# Altium PCB MainPCBV6.PcbDoc (part 4 of 5)
Units mm, origin at the board's own origin, x right, y up, seen from the top; angles counter-clockwise.
Board outline 176 x 144.01 mm, 2 copper layers (Top Layer, Bottom Layer); 220 components, 240 nets, 911 pads, 254 vias.
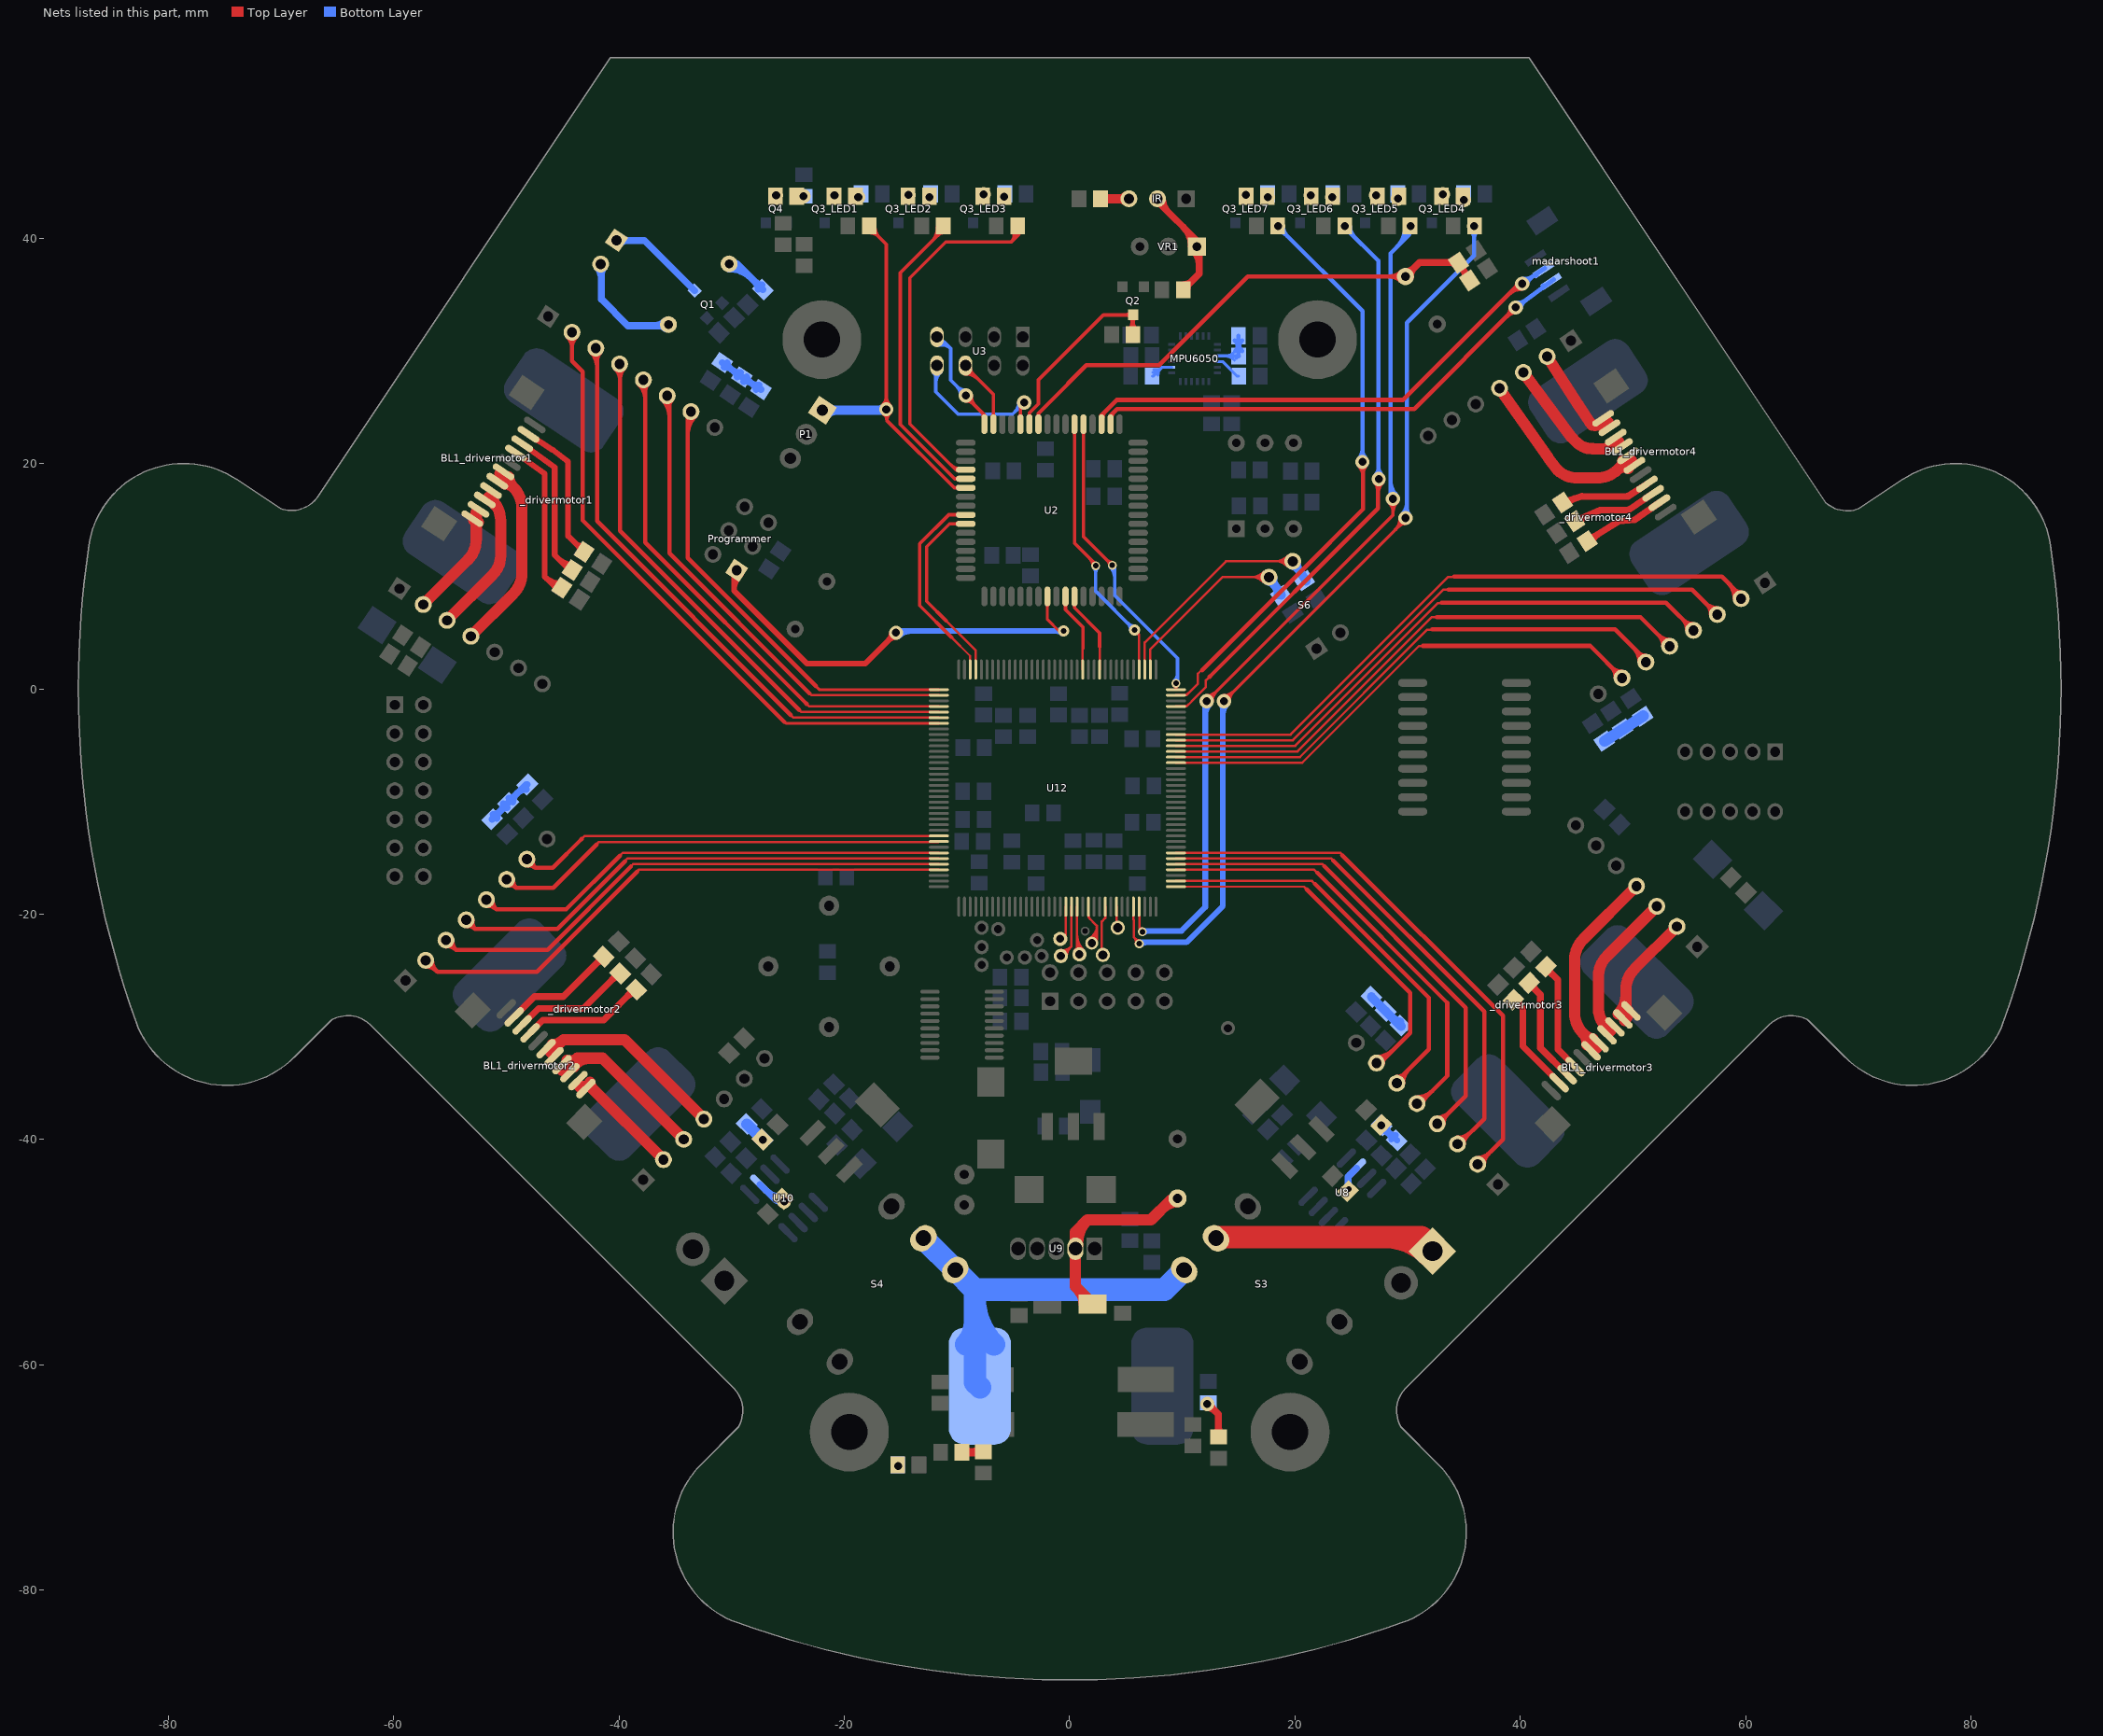
[diagram p4: the nets of this part, all layers, seen from the top]

## Via types
v1: diameter 1.27, hole 0.711, Top Layer to Bottom Layer, 214 vias
v2: diameter 1, hole 0.5, Top Layer to Bottom Layer, 17 vias
v3: diameter 2, hole 1, Top Layer to Bottom Layer, 11 vias
v4: diameter 0.8, hole 0.5, Top Layer to Bottom Layer, 8 vias
v5: diameter 1.778, hole 0.965, Top Layer to Bottom Layer, 3 vias
v6: diameter 0.75, hole 0.5, Top Layer to Bottom Layer, 1 vias

## Nets (pads, with @x,y where several pads share a name; then routed paths per layer and width w, separated by ;. In a path a pad name is that pad's centre, name@x,y a point inside that pad or via, vN(x,y) a via of type N, cw(c..) or ccw(c..) an arc to the next point about the centre after c; other vN are vias at no path point) (continued)
IO131: pad.6 U12.132 | length 8.5
  Top Layer w0.203: U12.132@1.658,-19.339 1.658,-20.276 2.413,-21.031 ; U12.132@1.681,-20.103 ccw(c2.156,-20.103) 1.82,-20.438 ; pad.6@1.734,-22.167 ccw(c1.125,-21.031) 2.413,-21.031 ; pad.6@1.83,-22.346 ccw(c1.307,-21.371) 2.413,-21.371 ; pad.6@1.926,-22.525 ccw(c1.489,-21.71) 2.413,-21.71 ; pad.6@2.022,-22.704 ccw(c1.671,-22.05) 2.413,-22.05 ; pad.6@2.032,-22.657 2.413,-22.276 2.413,-21.031
IO132: pad.16 U12.135 | length 4.2
  Top Layer w0.203: pad.16@2.819,-23.368 2.845,-23.343 2.845,-20.661 3.158,-20.348 U12.135@3.158,-19.339
IO135: pad.15 U12.137 | length 1.9
  Top Layer w0.203: U12.137@4.158,-19.339 4.158,-21.1 pad.15@4.267,-21.209
IO137: pad.13 U12.128 | length 2.9
  Top Layer w0.203: pad.13@-0.66,-22.149 -0.342,-21.831 U12.128@-0.342,-19.339
IO140: pad.4 U12.129 | length 7.2
  Top Layer w0.203: pad.4@-0.787,-23.52 -0.483,-23.52 0.158,-22.88 ; pad.4@-0.752,-23.395 ccw(c-0.672,-22.651) -0.143,-23.18 ; pad.4@-0.73,-23.193 ccw(c-0.614,-22.109) 0.158,-22.88 ; pad.4@-0.254,-23.724 cw(c0.788,-23.724) 0.051,-22.986 ; U12.129@0.158,-19.339 0.158,-22.88
IO141: pad.5 U12.130 | length 7.9
  Top Layer w0.203: pad.5@0.486,-23.194 ccw(c0.073,-22.78) 0.658,-22.78 ; pad.5@0.658,-23.266 U12.130@0.658,-19.339 ; 0.658,-22.768 ccw(c1.667,-22.768) pad.5@0.953,-23.481 ; 0.658,-22.277 ccw(c2.158,-22.277) pad.5@1.097,-23.338 ; 0.658,-21.787 ccw(c2.648,-21.787) pad.5@1.241,-23.194
IR1: Q2.1 R14.2 U2.27 | length 22.6
  Top Layer w0.305: U2.27@-3.661,24.186 ccw(c-3.871,24.396) -3.575,24.396 ccw(c-3.279,24.396) U2.27@-3.488,24.186 ; U2.27@-3.575,23.5 -3.575,24.493 -2.769,25.299 -2.769,27.432 2.992,33.192 Q2.1@5.639,33.192 5.522,33.076 R14.2@5.522,31.445 ; -2.775,25.394 -2.769,25.4 ; R14.2@5.272,31.897 ccw(c4.668,32.501) 5.522,32.501 ; Q2.1@5.428,32.957 cw(c5.202,32.731) Q2.1@5.522,32.731 ; Q2.1@5.428,32.982 ccw(c4.92,32.474) 4.92,33.192 ccw(c4.92,33.911) Q2.1@5.428,33.403 ; R14.2@5.522,32.167 cw(c6.639,32.167) Q2.1@5.849,32.957 ; 5.522,32.256 ccw(c6.334,32.256) R14.2@5.76,31.682 ; Q2.1@5.522,32.992 ccw(c7.07,32.992) R14.2@5.975,31.897 ; 5.658,32.483 cw(c6.062,32.591) Q2.1@5.815,32.927
IRQ: U2.28 U3.8 | length 17.7
  Top Layer w0.305: U2.28@-4.461,24.186 ccw(c-4.671,24.396) -4.375,24.396 ccw(c-4.079,24.396) U2.28@-4.288,24.186 ; U2.28@-4.375,23.5 -4.375,25.14 v1@-4.013,25.502
  Bottom Layer w0.305: U3.8@-12.102,28.086 cw(c-12.621,27.567) -11.887,27.567 ; -11.887,27.076 cw(c-10.46,27.076) U3.8@-11.469,28.086 ; U3.8@-11.786,28.753 -11.887,28.651 -11.887,26.365 -9.906,24.384 -5.08,24.384 v1(-4.039,25.425) ; v1@-4.521,25.425 cw(c-5.686,25.425) -4.862,24.602 cw(c-4.039,23.778) v1@-4.039,24.943
K_TEST: C3.1 R8.1 S2.1 U2.26 | length 54.1
  Top Layer w0.305: U2.26@-2.861,24.186 ccw(c-3.071,24.396) -2.775,24.396 ccw(c-2.479,24.396) U2.26@-2.688,24.186 ; U2.26@-2.775,23.5 -2.775,24.454 -0.127,27.102
  Top Layer w0.4: -0.14,27.114 1.473,28.727 7.925,28.727 15.804,36.607 S2.1@29.808,36.607 ; S2.1@29.41,36.209 ccw(c28.451,35.25) 28.451,36.607 ccw(c28.451,37.963) S2.1@29.41,37.004
  Top Layer w0.6: S2.1@29.808,36.607 31.047,37.846 R8.1@34.569,37.846 ; S2.1@29.808,37.069 ccw(c29.808,38.184) 30.596,37.395 ccw(c31.385,36.607) S2.1@30.27,36.607 ; 33.46,37.846 ccw(c33.46,38.91) R8.1@34.213,38.158 ; R8.1@33.77,37.846 cw(c33.77,37.22) R8.1@34.213,37.663 ; R8.1@34.5,37.401 cw(c34.328,36.577) 35.033,37.038 ; R8.1@34.516,37.827 34.523,37.816 35.535,36.271 C3.1@35.585,36.195 ; R8.1@34.914,37.673 ccw(c35.744,37.5) 35.035,37.035 ; 34.97,37.134 cw(c34.162,36.604) C3.1@35.108,36.407 ; 35.064,36.99 ccw(c35.669,37.386) C3.1@35.522,36.678
KICK_CHIP: madarshoot1.2 U2.18 | length 48.9
  Top Layer w0.4: U2.18@3.625,23.5 3.625,24.254 4.212,24.841 30.582,24.841 v1(39.599,33.858) ; U2.18@3.7,24.1 cw(c4.254,24.1) 3.863,24.492 ; v1@39.164,33.858 cw(c38.113,33.858) 38.856,33.116 cw(c39.599,32.373) v1@39.599,33.423
  Bottom Layer w0.4: v1(39.599,33.858) 42.735,36.169 madarshoot1.2@42.977,36.347 ; v1@39.664,34.288 ccw(c39.821,35.327) 40.444,34.481 ccw(c41.067,33.636) v1@40.029,33.793 ; madarshoot1.2@41.93,35.576 ccw(c41.738,35.837) madarshoot1.2@42.058,35.789
KICK_DIR: madarshoot1.3 U2.19 | length 49.3
  Top Layer w0.4: U2.19@2.825,23.5 2.825,24.303 4.164,25.641 29.578,25.641 v1@39.967,36.03 ; U2.19@2.9,24.1 cw(c3.572,24.1) 3.097,24.574 ; 38.981,35.044 cw(c40.157,33.868) v1@40.157,35.531 ; 39.594,35.657 ccw(c39.285,35.966) v1@39.722,35.966
  Bottom Layer w0.4: v1(40.157,35.966) 42.028,37.229 madarshoot1.3@42.189,37.338 ; v1@40.24,36.393 ccw(c40.44,37.424) 41.028,36.554 ccw(c41.615,35.684) v1@40.584,35.884 ; 41.19,36.664 cw(c41.38,36.382) madarshoot1.3@41.445,36.715
LED1: P1.1 R16_LED1.1 U2.38 | length 41
  Top Layer w0.305: R16_LED1.1@-17.79,40.494 cw(c-17.79,39.318) -16.959,40.149 ; R16_LED1.1@-17.79,40.98 -16.281,39.472 v1(-16.281,24.816) ; R16_LED1.1@-17.293,40.991 ccw(c-16.065,40.991) -16.933,40.123 ; v1@-16.623,25.157 ccw(c-17.447,25.981) -16.281,25.981 ccw(c-15.116,25.981) v1@-15.94,25.157 ; v1@-16.547,24.413 cw(c-16.937,23.824) -16.231,23.824 cw(c-15.358,23.824) v1@-15.953,24.463 ; v1@-16.231,24.714 -16.231,23.825 -10.255,17.85 U2.38@-9.225,17.85 ; U2.38@-9.911,17.763 ccw(c-10.121,17.554) -10.121,17.85 ccw(c-10.121,18.146) U2.38@-9.911,17.936
  Bottom Layer w0.8: P1.1@-21.946,24.74 -16.434,24.74 v1@-16.332,24.841 ; P1.1@-21.55,24.358 cw(c-20.63,23.438) -20.63,24.74 ; P1.1@-21.55,25.065 ccw(c-20.764,25.852) -20.764,24.74 ; -17.033,24.74 ccw(c-17.033,25.567) v1@-16.448,24.982
LED2: R16_LED2.1 U2.37 | length 29.9
  Top Layer w0.305: -12.257,39.712 ccw(c-13.536,40.991) R16_LED2.1@-11.727,40.991 ; -11.737,40.232 ccw(c-12.496,40.991) R16_LED2.1@-11.422,40.991 ; -11.648,40.32 cw(c-11.229,39.901) R16_LED2.1@-11.229,40.494 ; R16_LED2.1@-11.43,40.919 -11.43,40.538 -15.037,36.932 -15.037,23.47 -10.217,18.65 U2.37@-9.225,18.65 ; U2.37@-9.911,18.563 ccw(c-10.121,18.354) -10.121,18.65 ccw(c-10.121,18.946) U2.37@-9.911,18.736
LED3: R16_LED3.1 U2.36 | length 37.1
  Top Layer w0.305: -10.551,19.873 ccw(c-9.825,20.6) U2.36@-9.825,19.572 ; U2.36@-9.911,19.363 ccw(c-10.121,19.154) -10.121,19.45 ccw(c-10.121,19.746) U2.36@-9.911,19.536 ; U2.36@-9.225,19.45 -10.128,19.45 -14.199,23.52 -14.199,36.474 -10.998,39.675 -5.182,39.675 ; R16_LED3.1@-5.052,40.735 cw(c-5.795,40.288) -5.182,39.675 ; -4.906,39.951 ccw(c-5.45,40.495) R16_LED3.1@-4.79,40.892 ; R16_LED3.1@-4.856,40.55 cw(c-5.034,40.208) -4.648,40.208 ; R16_LED3.1@-4.648,41.046 -4.648,40.208 ; R16_LED3.1@-4.633,41.061 ccw(c-4.72,41.148) -4.625,41.07 ccw(c-4.72,41.148) -4.597,41.148 cw(c-4.53,41.215) -4.625,41.215 R16_LED3.1@-4.625,41.421 ; -4.63,40.226 ccw(c-5.106,40.702) R16_LED3.1@-4.529,41.049 ; R16_LED3.1@-4.433,40.532 ccw(c-4.296,40.208) -4.648,40.208 ; -5.182,39.675 -4.648,40.208
LED4: R16_LED4.1 U12.140 | length 92
  Top Layer w0.203: U12.140@5.658,-19.339 5.658,-20.499 5.715,-20.556 5.715,-22.073 ; 5.836,-22.194 ccw(c6.172,-21.858) v4@6.172,-22.333 ; v4@5.878,-22.582 ccw(c5.302,-22.485) 5.715,-22.073 ; v4@6.198,-22.555 5.715,-22.073
  Top Layer w0.305: v1(13.691,-1.092) 29.845,15.062 v1@29.845,15.265 ; v1@13.691,-0.61 ccw(c13.691,0.556) 14.514,-0.268 ccw(c15.338,-1.092) v1@14.173,-1.092 ; 28.906,14.123 ccw(c27.865,15.164) v1@29.337,15.164 ; 29.213,14.43 cw(c29.82,13.823) v1@29.82,14.681 ; 29.426,14.643 ccw(c28.906,15.164) v1@29.642,15.164
  Bottom Layer w0.381: v1@29.505,15.478 ccw(c28.44,16.544) 29.947,16.544 ; v1@29.845,15.24 29.947,15.342 29.947,32.512 35.916,38.481 35.916,41.072 v1@35.814,41.173 ; 29.947,15.93 ccw(c30.586,15.93) v1@30.134,15.478 ; v1@35.576,40.757 cw(c34.756,39.937) 35.916,39.937 ; 35.916,40.06 cw(c36.902,40.06) v1@36.205,40.757
  Bottom Layer w0.508: v4@6.275,-22.735 cw(c6.831,-23.29) 6.831,-22.504 ; v4@6.325,-22.504 10.363,-22.504 13.602,-19.266 v1@13.602,-1.435 ; v1@13.421,-1.362 cw(c12.985,-1.797) 13.602,-1.797 ; 13.602,-2.227 cw(c14.825,-2.227) v1@13.96,-1.362
  other v1: 29.82,15.164 35.89,41.072
  other v4: 6.172,-22.631
LED5: R16_LED5.1 U12.141 | length 89.3
  Top Layer w0.203: U12.141@6.141,-20.119 cw(c6.005,-20.255) 6.198,-20.255 ; U12.141@6.158,-19.339 6.198,-19.379 6.198,-21.209 ; v4@6.211,-21.388 ccw(c6.1,-21.306) 6.198,-21.209 ; v4@6.397,-21.271 cw(c6.357,-21.05) 6.198,-21.209 ; v4@6.502,-21.514 6.198,-21.209
  Top Layer w0.305: v1(12.167,-1.092) 28.702,15.443 v1@28.702,16.713 ; v1@12.167,-0.61 ccw(c12.167,0.556) 12.99,-0.268 ccw(c13.814,-1.092) v1@12.649,-1.092 ; v1@28.361,16.524 cw(c27.537,15.7) 28.702,15.7 cw(c29.867,15.7) v1@29.043,16.524
  Bottom Layer w0.381: v1@28.473,16.713 v1@28.588,16.828 ; 28.473,17.571 ccw(c29.407,17.571) v1@28.747,16.911 ; 28.473,18.491 ccw(c30.327,18.491) v1@29.016,17.18 ; v1@28.6,16.815 28.473,16.942 28.473,38.659 30.15,40.335 v1@30.15,41.123 ; v1@28.629,16.793 v1(28.702,16.866) ; 29.044,39.229 ccw(c27.201,41.072) v1@29.807,41.072 ; 29.694,39.879 ccw(c28.502,41.072) v1@30.188,41.072 ; v1@29.963,40.734 cw(c29.617,40.328) 30.15,40.328 cw(c30.485,40.328) v1@30.384,40.648
  Bottom Layer w0.508: v4@6.426,-21.488 9.931,-21.488 12.04,-19.38 12.04,-1.245 v1@12.167,-1.118 ; v4@6.555,-21.668 cw(c6.988,-22.101) 6.988,-21.488 ; 12.04,-2.319 cw(c13.393,-2.319) v1@12.436,-1.362
  other v1: 30.251,41.072
  other v4: 6.452,-21.565
LED6: R16_LED6.1 U12.33 | length 57.3
  Top Layer w0.203: U12.33@9.433,-1.564 10.374,-1.564 11.23,-0.708 11.23,-0.704 12.09,0.156 12.09,0.762 12.421,1.092 ; U12.33@10.197,-1.54 ccw(c10.197,-1.056) 10.54,-1.398
  Top Layer w0.381: 12.433,1.079 27.356,16.002 v1@27.356,18.618 ; v1@27.118,18.304 cw(c26.543,17.729) 27.356,17.729 ; 27.356,17.361 cw(c28.689,17.361) v1@27.746,18.304
  Bottom Layer w0.381: v1@24.397,40.805 24.6,40.805 27.407,37.998 v1@27.407,18.44 ; v1@24.435,40.627 cw(c24.435,39.799) 25.02,40.385 ; v1@24.879,41.072 ccw(c26.198,41.072) 25.265,40.14 ; v1@27.118,18.933 ccw(c26.42,19.63) 27.407,19.63 ; 27.407,19.753 ccw(c28.566,19.753) v1@27.746,18.933
  other v1: 27.432,18.618 24.435,41.072
LED7: R16_LED7.1 U12.35 | length 57.6
  Top Layer w0.203: U12.35@9.433,-0.564 10.358,-0.564 11.379,0.457 11.379,1.346 11.709,1.676 ; U12.35@10.197,-0.54 ccw(c10.197,-0.094) 10.512,-0.41
  Top Layer w0.381: 11.735,1.651 20.27,10.186 20.271,10.186 26.035,15.95 v1@26.035,20.193 ; v1@25.67,19.828 cw(c24.788,18.946) 26.035,18.946 ; 26.035,19.192 cw(c26.935,19.192) v1@26.299,19.828
  Bottom Layer w0.381: v1@18.491,40.627 cw(c18.491,39.677) 19.163,40.349 ; v1@18.847,40.869 18.644,40.869 25.984,33.528 v1@25.984,20.091 ; v1@18.936,41.072 ccw(c20.131,41.072) 19.286,40.226 ; v1@25.67,20.457 ccw(c24.911,21.215) 25.984,21.215 ccw(c27.057,21.215) v1@26.299,20.457
  other v1: 25.984,20.142 18.491,41.072
M0: R28.1 S6.4 U12.38 | length 22.8
  Top Layer w0.203: U12.38@7.158,1.88 7.158,3.526 13.55,9.917 S6.4@17.685,9.917 ; S6.4@17.227,9.459 ccw(c16.12,8.352) 16.12,9.917 ccw(c16.12,11.483) S6.4@17.227,10.376 ; S6.4@17.371,9.603 ccw(c16.611,8.843) 16.611,9.917 ccw(c16.611,10.992) S6.4@17.371,10.232
  Bottom Layer w0.8: S6.4@17.625,9.573 cw(c17.478,8.741) 18.17,9.225 cw(c18.862,9.71) S6.4@18.03,9.857 ; S6.4@17.685,9.917 18.792,8.337 R28.1@18.796,8.331 ; 18.378,8.929 cw(c17.746,8.486) R28.1@18.505,8.352
M1N1: _drivermotor1.3 U12.74 | length 45.9
  Top Layer w0.203: -23.114,-0.381 -22.931,-0.564 U12.74@-11.617,-0.564
  Top Layer w0.381: _drivermotor1.3@-36.125,25.617 cw(c-37.549,24.192) -35.535,24.192 ; _drivermotor1.3@-35.855,25.886 cw(c-36.629,25.112) -35.535,25.112 ; -35.535,25.131 cw(c-34.848,25.131) _drivermotor1.3@-35.333,25.617 ; _drivermotor1.3@-35.535,25.818 -35.535,12.04 -23.114,-0.381
M1N2: _drivermotor2.3 U12.100 | length 42
  Top Layer w0.203: -42.012,-13.792 -41.834,-13.614 -11.668,-13.614 U12.100@-11.617,-13.564 ; -12.56,-13.614 ccw(c-12.56,-13.385) U12.100@-12.398,-13.547
  Top Layer w0.381: _drivermotor2.3@-49.886,-16.916 -49.149,-17.653 ; _drivermotor2.3@-49.844,-17.461 cw(c-49.665,-18.169) -49.149,-17.653 ; _drivermotor2.3@-49.423,-16.945 ccw(c-48.486,-16.99) -49.149,-17.653 ; -41.999,-13.805 -45.847,-17.653 -49.149,-17.653
M1N3: _drivermotor3.3 U12.2 | length 37.6
  Top Layer w0.203: U12.2@9.433,-17.064 21.509,-17.064 21.793,-17.348 21.844,-17.348
  Top Layer w0.381: 21.793,-17.348 31.872,-27.427 31.872,-32.009 _drivermotor3.3@28.931,-34.95 ; _drivermotor3.3@29.035,-34.461 ccw(c29.035,-33.532) 29.692,-34.189 ; _drivermotor3.3@29.594,-35.021 cw(c31.366,-35.021) 30.113,-33.768
M1N4: _drivermotor4.3 U12.24 | length 49.8
  Top Layer w0.203: U12.24@9.433,-6.064 20.429,-6.064 31.751,5.258 32.182,5.258
  Top Layer w0.381: 32.182,5.283 48.412,5.283 _drivermotor4.3@51.257,2.438 ; 50.072,3.624 cw(c48.823,2.375) _drivermotor4.3@50.589,2.375 ; 50.488,3.208 ccw(c51.149,3.869) _drivermotor4.3@51.149,2.934
M1P1: _drivermotor1.2 U12.73 | length 42.8
  Top Layer w0.254: -22.517,0.216 -22.237,-0.064 U12.73@-11.617,-0.064
  Top Layer w0.381: -33.909,22.544 cw(c-31.557,22.544) _drivermotor1.2@-33.22,24.208 ; -33.909,23.464 cw(c-32.476,23.464) _drivermotor1.2@-33.489,24.477 ; _drivermotor1.2@-33.909,24.31 -33.909,11.608 -22.517,0.216
M1P2: _drivermotor2.2 U12.99 | length 39.5
  Top Layer w0.203: -43.332,-13.335 -43.061,-13.064 U12.99@-11.617,-13.064
  Top Layer w0.381: _drivermotor2.2@-48.184,-15.164 -47.447,-15.9 ; _drivermotor2.2@-48.11,-15.677 cw(c-48.003,-16.457) -47.447,-15.9 ; _drivermotor2.2@-47.639,-15.243 ccw(c-46.944,-15.397) -47.447,-15.9 ; -43.332,-13.335 -45.898,-15.9 -47.447,-15.9
M1P3: _drivermotor3.2 U12.1 | length 35.4
  Top Layer w0.203: U12.1@9.433,-17.564 20.79,-17.564 21.031,-17.805 21.031,-17.831
  Top Layer w0.381: 21.031,-17.805 30.226,-27 30.226,-30.556 27.61,-33.172 _drivermotor3.2@27.254,-33.172 ; _drivermotor3.2@27.239,-33.046 ccw(c27.239,-31.846) 28.088,-32.695 ; _drivermotor3.2@27.239,-32.665 ccw(c27.239,-30.545) 28.738,-32.044 ; _drivermotor3.2@27.798,-33.225 cw(c28.379,-33.225) 27.968,-32.814
M1P4: _drivermotor4.2 U12.23 | length 47.2
  Top Layer w0.203: U12.23@9.433,-6.564 20.636,-6.564 31.01,3.81 31.344,3.81
  Top Layer w0.381: 31.344,3.81 46.203,3.81 _drivermotor4.2@49.073,0.94 ; 48.072,1.941 cw(c47.097,0.966) _drivermotor4.2@48.476,0.966 ; 48.1,1.913 ccw(c49.035,2.848) _drivermotor4.2@49.035,1.525
M2: R30.1 S6.3 U12.39 | length 26.1
  Top Layer w0.203: U12.39@6.658,1.711 6.658,4.118 13.866,11.326 S6.3@19.799,11.326 ; S6.3@19.34,10.868 ccw(c18.233,9.761) 18.233,11.326 ccw(c18.233,12.892) S6.3@19.34,11.785 ; S6.3@19.484,11.012 ccw(c18.724,10.252) 18.724,11.326 ccw(c18.724,12.401) S6.3@19.484,11.641
  Bottom Layer w0.8: S6.3@19.732,10.983 cw(c19.571,10.153) 20.271,10.626 cw(c20.972,11.099) S6.3@20.142,11.26 ; S6.3@19.799,11.326 20.922,9.663 R30.1@20.98,9.576
M2N1: _drivermotor1.5 U12.77 | length 51.9
  Top Layer w0.203: -24.003,-1.88 -23.819,-2.064 U12.77@-11.617,-2.064
  Top Layer w0.381: _drivermotor1.5@-40.351,28.434 cw(c-41.433,27.353) -39.903,27.353 ; _drivermotor1.5@-39.956,28.83 -39.903,28.778 -39.903,14.021 -24.003,-1.88 ; -39.903,27.606 cw(c-38.732,27.606) _drivermotor1.5@-39.56,28.434
M2N2: _drivermotor2.5 U12.103 | length 46.5
  Top Layer w0.203: -39.472,-15.265 -39.27,-15.064 U12.103@-11.617,-15.064
  Top Layer w0.381: _drivermotor2.5@-53.594,-20.498 -52.781,-21.311 ; _drivermotor2.5@-53.501,-21.066 cw(c-53.39,-21.919) -52.781,-21.311 ; _drivermotor2.5@-53.02,-20.592 ccw(c-52.184,-20.713) -52.781,-21.311 ; -39.446,-15.291 -45.466,-21.311 -52.781,-21.311
M2N3: _drivermotor3.5 U12.5 | length 44.7
  Top Layer w0.203: U12.5@9.433,-15.564 22.447,-15.564 22.631,-15.748
  Top Layer w0.381: 22.619,-15.761 35.164,-28.306 35.164,-36.134 _drivermotor3.5@32.512,-38.786 ; _drivermotor3.5@32.627,-38.053 ccw(c32.627,-36.562) 33.681,-37.617 ; _drivermotor3.5@33.186,-38.613 cw(c34.397,-38.613) 33.541,-37.757
M2N4: _drivermotor4.5 U12.26 | length 54.5
  Top Layer w0.203: U12.26@9.433,-5.064 20.015,-5.064 32.699,7.62 33.02,7.62
  Top Layer w0.381: 33.02,7.645 52.934,7.645 _drivermotor4.5@55.524,5.055 ; 54.413,6.166 cw(c53.439,5.192) _drivermotor4.5@54.816,5.192 ; 54.439,6.14 ccw(c55.376,7.076) _drivermotor4.5@55.376,5.752
M2P1: _drivermotor1.4 U12.76 | length 49.5
  Top Layer w0.203: -23.368,-1.321 -23.125,-1.564 U12.76@-11.617,-1.564
  Top Layer w0.381: _drivermotor1.4@-38.238,27.026 cw(c-39.614,25.65) -37.668,25.65 ; _drivermotor1.4@-37.969,27.295 cw(c-38.694,26.57) -37.668,26.57 ; _drivermotor1.4@-37.842,27.421 -37.668,27.247 -37.668,12.979 -23.368,-1.321 ; -37.668,26.491 cw(c-36.912,26.491) _drivermotor1.4@-37.447,27.026
M2P2: _drivermotor2.4 U12.102 | length 44.4
  Top Layer w0.203: -39.929,-14.808 -39.684,-14.564 U12.102@-11.617,-14.564
  Top Layer w0.381: _drivermotor2.4@-51.765,-18.72 -50.902,-19.583 ; _drivermotor2.4@-51.736,-19.273 cw(c-51.658,-20.34) -50.902,-19.583 ; _drivermotor2.4@-51.219,-18.748 ccw(c-50.131,-18.813) -50.902,-19.583 ; -39.929,-14.808 -44.704,-19.583 -50.902,-19.583
M2P3: _drivermotor3.4 U12.4 | length 42.1
  Top Layer w0.203: U12.4@9.433,-16.064 21.703,-16.064 21.996,-16.358
  Top Layer w0.381: 21.996,-16.358 33.518,-27.879 33.518,-34.376 _drivermotor3.4@30.937,-36.957 ; _drivermotor3.4@30.831,-36.638 ccw(c30.831,-35.612) 31.556,-36.338 ; _drivermotor3.4@30.831,-36.257 ccw(c30.831,-34.311) 32.207,-35.687 ; _drivermotor3.4@31.39,-36.817 cw(c32.145,-36.817) 31.611,-36.283
M2P4: _drivermotor4.4 U12.25 | length 52.1
  Top Layer w0.203: U12.25@9.433,-5.564 20.222,-5.564 32.161,6.375 32.588,6.375
  Top Layer w0.381: 32.588,6.375 50.673,6.375 _drivermotor4.4@53.365,3.683 ; 52.305,4.743 cw(c51.345,3.784) _drivermotor4.4@52.703,3.784 ; 52.312,4.737 ccw(c53.262,5.687) _drivermotor4.4@53.262,4.343
M3N1: _drivermotor1.7 U12.79 | length 58.3
  Top Layer w0.254: -25.354,-2.916 -25.206,-3.064 U12.79@-11.617,-3.064
  Top Layer w0.381: _drivermotor1.7@-44.578,31.252 cw(c-45.533,30.297) -44.183,30.297 cw(c-42.832,30.297) _drivermotor1.7@-43.787,31.252 ; _drivermotor1.7@-44.183,31.648 -44.183,29.095 -43.231,28.143 -43.231,14.961 -25.354,-2.916
M3N2: _drivermotor2.7 U12.105 | length 51.9
  Top Layer w0.203: -38.405,-16.205 -38.263,-16.064 U12.105@-11.617,-16.064
  Top Layer w0.381: _drivermotor2.7@-57.175,-24.079 -56.134,-25.121 -47.283,-25.121 -38.386,-16.224 ; _drivermotor2.7@-57.166,-24.663 cw(c-57.166,-26.047) -56.186,-25.068 ; _drivermotor2.7@-56.606,-24.103 ccw(c-55.289,-24.103) -56.22,-25.034
M3N3: _drivermotor3.7 U12.7 | length 51.4
  Top Layer w0.203: U12.7@9.433,-14.564 24.038,-14.564 24.206,-14.732
  Top Layer w0.381: 24.181,-14.757 38.456,-29.032 38.456,-40.005 _drivermotor3.7@36.17,-42.291 ; _drivermotor3.7@36.219,-41.646 ccw(c36.219,-40.206) 37.237,-41.224 ; _drivermotor3.7@36.778,-42.205 cw(c38.04,-42.205) 37.148,-41.313
M3N4: _drivermotor4.7 U12.28 | length 59.8
  Top Layer w0.203: U12.28@9.433,-4.064 19.601,-4.064 33.596,9.931 34.112,9.931
  Top Layer w0.381: 34.112,9.957 57.887,9.957 59.487,8.357 _drivermotor4.7@59.842,8.357 ; 58.484,9.359 cw(c57.135,8.01) _drivermotor4.7@59.043,8.01 ; 59.041,8.802 ccw(c59.602,9.364) _drivermotor4.7@59.602,8.57 ; 59.135,8.709 cw(c58.436,8.01) _drivermotor4.7@59.424,8.01
M3P1: _drivermotor1.6 U12.78 | length 55.1
  Top Layer w0.203: -24.751,-2.325 -24.513,-2.564 U12.78@-11.617,-2.564
  Top Layer w0.381: _drivermotor1.6@-42.465,29.843 cw(c-43.682,28.626) -41.961,28.626 ; _drivermotor1.6@-42.069,30.239 -41.961,30.131 -41.961,14.884 -24.751,-2.325 ; -41.961,29.15 cw(c-40.98,29.15) _drivermotor1.6@-41.674,29.843
M3P2: _drivermotor2.6 U12.104 | length 49
  Top Layer w0.203: -38.964,-15.773 -38.754,-15.564 U12.104@-11.617,-15.564
  Top Layer w0.381: _drivermotor2.6@-55.321,-22.327 -54.483,-23.165 ; _drivermotor2.6@-55.317,-22.864 cw(c-55.22,-23.902) -54.483,-23.165 ; _drivermotor2.6@-54.81,-22.329 ccw(c-53.691,-22.372) -54.483,-23.165 ; -38.951,-15.786 -46.33,-23.165 -54.483,-23.165
M3P3: _drivermotor3.6 U12.6 | length 47.7
  Top Layer w0.203: U12.6@9.433,-15.064 23.243,-15.064 23.419,-15.24
  Top Layer w0.381: 23.406,-15.253 36.81,-28.656 36.81,-38.171 _drivermotor3.6@34.671,-40.31 ; _drivermotor3.6@34.423,-39.849 ccw(c34.423,-38.139) 35.632,-39.348 ; _drivermotor3.6@34.982,-40.409 cw(c35.973,-40.409) 35.273,-39.708
M3P4: _drivermotor4.6 U12.27 | length 56.8
  Top Layer w0.203: U12.27@9.433,-4.564 19.808,-4.564 33.186,8.814 33.63,8.814
  Top Layer w0.381: 33.63,8.814 55.245,8.814 _drivermotor4.6@57.582,6.477 ; 56.48,7.579 ccw(c57.489,8.588) _drivermotor4.6@57.489,7.161 ; 56.556,7.503 cw(c55.655,6.601) _drivermotor4.6@56.929,6.601
MISO: U2.32 U3.7 | length 16.3
  Top Layer w0.305: v1@-9.246,25.984 -7.785,24.524 ; v1@-9.22,25.552 cw(c-9.22,24.571) -8.526,25.265 ; v1@-8.738,26.035 ccw(c-7.389,26.035) -8.342,25.081 ; U2.32@-7.689,24.144 ccw(c-8.033,24.276) -7.772,24.536 -7.575,24.339 U2.32@-7.575,23.5 ; U2.32@-7.62,23.368 U2.32@-7.62,23.5
  Bottom Layer w0.305: U3.7@-11.963,31.471 -11.836,31.471 -10.566,30.201 ; U3.7@-11.751,30.803 cw(c-11.545,29.983) -10.947,30.581 ; U3.7@-11.677,30.508 cw(c-11.393,29.374) -10.566,30.201 ; -10.062,26.902 cw(c-10.929,26.035) v1@-9.703,26.035 ; -10.001,26.841 ccw(c-9.22,27.621) v1@-9.22,26.518 ; v1(-9.22,26.035) v1@-9.195,26.035 ; v1@-9.144,25.984 v1@-9.195,26.035 ; v1@-9.144,26.035 v1@-9.195,26.035 ; -10.566,30.201 -10.566,27.407 v1@-9.195,26.035
MISO_CUR1: U2.42 U12.69 | length 17.5
  Top Layer w0.203: -10.947,6.019 -8.342,3.415 U12.69@-8.342,1.711
  Top Layer w0.305: -10.947,6.019 -12.7,7.772 -12.7,12.624 -10.674,14.65 U2.42@-9.225,14.65 ; U2.42@-9.911,14.563 ccw(c-10.121,14.354) -10.121,14.65 ccw(c-10.121,14.946) U2.42@-9.911,14.736
MISO_CUR2: U2.22 U12.40 | length 28.2
  Top Layer w0.203: v2(5.766,5.207) 6.158,4.815 ; v2@5.943,4.85 cw(c6.026,4.683) 6.158,4.815 ; v2@6.123,5.03 ccw(c6.29,4.947) 6.158,4.815 ; U12.40@6.158,1.711 6.158,4.815
  Top Layer w0.305: U2.22@0.339,22.813 cw(c0.129,22.604) 0.425,22.604 cw(c0.721,22.604) U2.22@0.512,22.813 ; U2.22@0.425,23.5 0.425,12.935 2.438,10.922 v4(2.311,10.922) ; 1.799,11.561 cw(c1.159,10.922) v4@2.064,10.922
  Bottom Layer w0.305: v4@2.136,10.747 cw(c1.714,10.324) 2.311,10.324 cw(c2.909,10.324) v4@2.486,10.747 ; v4(2.311,10.922) 2.311,8.661 v2(5.766,5.207) ; v2@5.418,5.207 ccw(c4.579,5.207) 5.172,5.8 ccw(c5.766,6.394) v2@5.766,5.555
MOSI: U2.31 U3.6 | length 9.1
  Top Layer w0.305: U3.6@-9.271,28.651 -6.775,26.155 U2.31@-6.775,23.5 ; U3.6@-9.246,27.954 cw(c-9.246,26.334) -8.099,27.48 ; U3.6@-9.246,28.259 cw(c-9.246,27.374) -8.62,28 ; U3.6@-8.798,28.402 ccw(c-8.258,28.402) -8.64,28.02 ; U2.31@-6.861,24.186 ccw(c-7.071,24.396) -6.775,24.396 ccw(c-6.479,24.396) U2.31@-6.688,24.186
  Top Layer w0.4: U3.6@-9.246,28.702 U3.6@-9.233,28.689
MOSI_CUR1: U2.41 U12.70 | length 18.6
  Top Layer w0.203: -10.486,4.568 -8.842,2.924 U12.70@-8.842,1.711
  Top Layer w0.305: -10.486,4.568 -13.31,7.391 -13.31,12.878 -10.738,15.45 U2.41@-9.225,15.45 ; U2.41@-9.911,15.363 ccw(c-10.121,15.154) -10.121,15.45 ccw(c-10.121,15.746) U2.41@-9.911,15.536
MOSI_CUR2: U2.21 U12.36 | length 31.5
  Top Layer w0.203: v4@9.272,0.232 cw(c9.082,-0.064) U12.36@9.433,-0.064 ; v4(9.433,0.483) U12.36@9.433,-0.064 ; v4@9.594,0.232 ccw(c9.784,-0.064) U12.36@9.433,-0.064
  Top Layer w0.305: U2.21@1.139,22.813 cw(c0.929,22.604) 1.225,22.604 cw(c1.521,22.604) U2.21@1.312,22.813 ; U2.21@1.225,23.5 1.225,13.507 3.759,10.973 v4(3.785,10.973) ; 3.319,11.413 ccw(c3.785,11.879) v4@3.785,11.22 ; 3.38,11.352 cw(c3.001,10.973) v4@3.537,10.973
  Bottom Layer w0.305: v4@3.61,10.798 cw(c2.696,9.884) 3.988,9.884 ; v4(3.785,10.973) 3.988,10.77 3.988,8.306 9.576,2.718 9.576,0.626 v4(9.433,0.483) ; v4@3.825,11.013 cw(c3.432,10.62) 3.988,10.62 ; v4@9.258,0.658 ccw(c8.49,1.426) 9.576,1.426
MOTOR_NUM0: U2.58 U12.50 | length 7.8
  Top Layer w0.203: 1.118,3.734 1.158,3.694 U12.50@1.158,1.711
  Top Layer w0.305: U2.58@-0.461,7.513 cw(c-0.671,7.304) -0.375,7.304 cw(c-0.079,7.304) U2.58@-0.288,7.513 ; U2.58@-0.375,8.2 -0.375,7.03 1.168,5.486 1.168,3.581
MOTOR_NUM1: U2.59 U12.47 | length 7.9
  Top Layer w0.203: U12.47@2.658,1.711 2.658,3.743
  Top Layer w0.305: U2.59@0.339,7.513 cw(c0.129,7.304) 0.425,7.304 cw(c0.721,7.304) U2.59@0.512,7.513 ; U2.59@0.425,8.2 0.425,7.195 2.658,4.962 2.658,3.743 2.667,3.734
MW1_DriverMotor1: _drivermotor1.14 BL1_drivermotor1.1 BL1_drivermotor1.2 | length 11
  Top Layer w1: _drivermotor1.14@-57.391,7.485 -53.424,11.453 ccw(c-55.22,13.249) -52.68,13.249 -52.68,15.646 ; BL1_drivermotor1.1@-52.893,14.964 ccw(c-53.407,15.479) -52.68,15.479 ; -52.68,14.393 cw(c-52.1,14.393) BL1_drivermotor1.1@-52.51,14.803
MW1_DriverMotor2: _drivermotor2.14 BL1_drivermotor2.1 BL1_drivermotor2.2 | length 10.8
  Top Layer w1: -43.485,-35.331 -43.459,-35.306 -42.55,-35.306 _drivermotor2.14@-36.062,-41.794 ; BL1_drivermotor2.1@-42.583,-34.925 ccw(c-41.744,-34.925) -42.338,-35.519
MW1_DriverMotor3: _drivermotor3.14 BL1_drivermotor3.1 BL1_drivermotor3.2 | length 12.7
  Top Layer w1: BL1_drivermotor3.2@48.686,-28.881 ccw(c47.015,-27.21) 49.378,-27.21 ; BL1_drivermotor3.2@49.251,-29.446 ccw(c48.456,-28.651) BL1_drivermotor3.1@49.581,-28.651 ; 49.378,-28.981 49.378,-26.686 cw(c51.918,-26.686) 49.581,-25.69 cw(c51.918,-26.686) 50.122,-24.89 _drivermotor3.14@53.91,-21.101 ; 49.581,-28.956 BL1_drivermotor3.1@49.581,-28.598
MW1_DriverMotor4: _drivermotor4.14 BL1_drivermotor4.1 BL1_drivermotor4.2 | length 9.4
  Top Layer w1: _drivermotor4.14@42.378,29.497 45.141,25.216 46.355,23.393 47.128,23.393 ccw(c47.128,24.347) 47.464,23.454 ccw(c47.128,24.347) 47.803,23.673 ; 46.14,23.716 ccw(c46.814,24.164) BL1_drivermotor4.1@46.655,23.371
MW2_DriverMotor1: _drivermotor1.13 BL1_drivermotor1.3 BL1_drivermotor1.4 | length 13.5
  Top Layer w1: _drivermotor1.13@-55.278,6.076 -51.194,10.16 ccw(c-52.82,11.786) -50.521,11.786 -50.521,14.95 ccw(c-53.061,14.95) -51.265,16.746 -51.562,17.043 ; BL1_drivermotor1.3@-51.169,16.505 cw(c-51.369,16.108) -50.947,16.247
MW2_DriverMotor2: _drivermotor2.13 BL1_drivermotor2.3 BL1_drivermotor2.4 | length 18.8
  Top Layer w1: BL1_drivermotor2.4@-45.148,-33.817 ccw(c-44.95,-33.505) -44.688,-33.766 ; BL1_drivermotor2.4@-44.612,-32.973 ccw(c-44.264,-32.426) -43.806,-32.884 ccw(c-43.305,-33.385) BL1_drivermotor2.3@-43.991,-33.561 ; BL1_drivermotor2.4@-44.567,-32.994 ccw(c-44.305,-32.2) -43.713,-32.791 ; -44.425,-33.503 -43.713,-32.791 ; BL1_drivermotor2.3@-43.997,-33.519 cw(c-43.026,-33.479) -43.713,-32.791 ; BL1_drivermotor2.3@-43.939,-33.37 cw(c-42.543,-34.766) -42.543,-32.791 ; _drivermotor2.13@-34.266,-39.998 -41.473,-32.791 -43.713,-32.791
MW2_DriverMotor3: _drivermotor3.13 BL1_drivermotor3.3 BL1_drivermotor3.4 | length 14.4
  Top Layer w1: 47.854,-30.302 47.683,-30.132 cw(c49.479,-28.336) 47.273,-29.595 ; 48.031,-30.353 47.273,-29.595 ; _drivermotor3.13@52.114,-19.305 47.683,-23.736 ccw(c49.479,-25.532) 46.965,-25.174 ccw(c49.479,-25.532) 46.939,-25.532 46.939,-28.336 ccw(c49.479,-28.336) 46.965,-28.694 ccw(c49.479,-28.336) 47.273,-29.595
MW2_DriverMotor4: _drivermotor4.13 BL1_drivermotor4.3 BL1_drivermotor4.4 | length 12.1
  Top Layer w1: _drivermotor4.13@40.259,28.092 40.263,28.087 40.308,28.027 44.588,22.287 44.97,21.905 ccw(c46.406,23.341) 46.406,21.311 ; 46.228,21.341 ccw(c46.617,23.851) 46.617,21.311 ; 46.558,21.285 47.103,21.285 ccw(c47.103,23.55) 48.501,21.768 ccw(c47.103,23.55) 48.704,21.948
MW3_DriverMotor1: _drivermotor1.12 BL1_drivermotor1.5 BL1_drivermotor1.6 | length 18.7
  Top Layer w1: _drivermotor1.12@-53.165,4.667 -49.385,8.446 ccw(c-51.181,10.242) -48.641,10.242 -48.641,16.093 ccw(c-51.181,16.093) -49.385,17.889 ; -50.597,19.101 -49.385,17.889 ; BL1_drivermotor1.5@-50.158,18.19 cw(c-50.114,17.16) -49.385,17.889 ; BL1_drivermotor1.6@-49.795,18.822 ccw(c-48.531,18.822) -49.425,17.929
MW3_DriverMotor2: _drivermotor2.12 BL1_drivermotor2.5 BL1_drivermotor2.6 | length 19
  Top Layer w1: -46.076,-32.283 -44.933,-31.14 -39.532,-31.14 _drivermotor2.12@-32.47,-38.202 ; BL1_drivermotor2.6@-45.925,-31.59 ccw(c-45.888,-30.371) -45.025,-31.233 ; BL1_drivermotor2.6@-45.919,-31.59 ccw(c-45.919,-30.294) -45.002,-31.21
MW3_DriverMotor3: _drivermotor3.12 BL1_drivermotor3.5 BL1_drivermotor3.6 | length 19
  Top Layer w1: 45.781,-30.795 ccw(c46.423,-30.152) BL1_drivermotor3.5@46.423,-31.061 ; BL1_drivermotor3.6@45.914,-31.595 ccw(c44.73,-31.434) 45.575,-30.589 ; 46.609,-31.725 46.787,-31.902 ; 46.66,-31.674 45.575,-30.589 ; _drivermotor3.12@50.318,-17.509 45.575,-22.252 ccw(c47.371,-24.048) 44.831,-24.048 44.831,-28.793 ccw(c47.371,-28.793) 45.575,-30.589
MW3_DriverMotor4: _drivermotor4.12 BL1_drivermotor4.5 BL1_drivermotor4.6 | length 17.9
  Top Layer w1: _drivermotor4.12@38.075,26.772 38.144,26.673 38.281,26.478 42.455,20.539 43.282,19.457 ccw(c45.07,21.26) 45.07,18.72 46.848,18.72 ccw(c46.848,21.26) 47.494,18.803 ccw(c46.848,21.26) 48.644,19.464 ; 48.897,19.716 ccw(c48.374,20.239) BL1_drivermotor4.5@49.113,20.239 ; BL1_drivermotor4.6@49.571,19.578 ccw(c49.181,18.927) 48.644,19.464 ; 49.886,20.269 ccw(c49.886,19.217) 49.142,19.961 48.644,19.464
NetBattery1_1: Battery1.1 S3.2 | length 25.8
  Top Layer w2: S3.2@12.987,-48.775 13.096,-48.666 31.217,-48.666 ; 27.945,-48.666 cw(c27.945,-54.199) Battery1.1@31.857,-50.287 ; Battery1.1@31.711,-49.917 ccw(c30.022,-49.861) 31.217,-48.666 ; Battery1.1@32.512,-49.962 31.217,-48.666
NetBL1_drivermotor1_8: BL1_drivermotor1.8 R11_drivermotor1.2 | length 16.4
  Top Layer w0.508: BL1_drivermotor1.8@-49.151,20.93 -46.609,19.101 -46.609,9.954 ; -45.788,9.133 ccw(c-45.125,9.796) R11_drivermotor1.2@-45.088,8.859 ; R11_drivermotor1.2@-45.448,8.793 -46.609,9.954 ; R11_drivermotor1.2@-45.108,9.367 cw(c-45.188,11.375) -46.609,9.954
NetBL1_drivermotor1_9: BL1_drivermotor1.9 R10_drivermotor1.2 | length 14.9
  Top Layer w0.508: BL1_drivermotor1.9@-48.596,21.762 -45.72,19.66 -45.72,11.885 R10_drivermotor1.2@-44.255,10.419 ; -45.4,11.565 ccw(c-44.097,12.868) R10_drivermotor1.2@-44.097,11.025
NetBL1_drivermotor1_10: BL1_drivermotor1.10 R9_drivermotor1.2 | length 14.4
  Top Layer w0.508: BL1_drivermotor1.10@-48.042,22.594 -45.889,21.2 -44.526,20.193 -44.526,13.561 R9_drivermotor1.2@-43.111,12.146 ; -43.969,13.004 ccw(c-43.056,13.916) R9_drivermotor1.2@-43.056,12.625 ; -43.634,12.669 cw(c-44.073,12.229) R9_drivermotor1.2@-43.452,12.229
NetBL1_drivermotor2_8: BL1_drivermotor2.8 R11_drivermotor2.2 | length 12.2
  Top Layer w0.6: BL1_drivermotor2.8@-47.899,-30.541 -46.771,-29.413 -41.377,-29.413 R11_drivermotor2.2@-38.608,-26.645 ; -39.21,-27.247 cw(c-38.55,-27.907) R11_drivermotor2.2@-38.55,-26.974 ; -39.122,-27.159 ccw(c-39.657,-26.624) R11_drivermotor2.2@-38.9,-26.624
NetBL1_drivermotor2_9: BL1_drivermotor2.9 R10_drivermotor2.2 | length 11.8
  Top Layer w0.6: BL1_drivermotor2.9@-48.606,-29.834 -47.143,-28.372 -43.18,-28.372 R10_drivermotor2.2@-40.03,-25.222 ; -40.62,-25.812 cw(c-39.971,-26.461) R10_drivermotor2.2@-39.971,-25.543 ; -40.547,-25.739 ccw(c-41.093,-25.193) R10_drivermotor2.2@-40.321,-25.193
NetBL1_drivermotor2_10: BL1_drivermotor2.10 R9_drivermotor2.2 | length 11.6
  Top Layer w0.6: BL1_drivermotor2.10@-49.313,-29.127 -47.516,-27.33 -44.958,-27.33 R9_drivermotor2.2@-41.3,-23.673 ; -42.036,-24.409 cw(c-41.36,-25.085) R9_drivermotor2.2@-41.36,-24.129 ; -41.925,-24.297 ccw(c-42.443,-23.779) R9_drivermotor2.2@-41.71,-23.779
NetBL1_drivermotor3_8: BL1_drivermotor3.8 R11_drivermotor3.2 | length 11.2
  Top Layer w0.6: R11_drivermotor3.2@42.219,-25.091 cw(c42.219,-25.991) 42.855,-25.355 ; R11_drivermotor3.2@42.24,-24.74 43.332,-25.832 43.332,-32.013 BL1_drivermotor3.8@44.867,-33.548 ; R11_drivermotor3.2@42.569,-24.741 ccw(c43.359,-24.741) 42.8,-25.3
NetBL1_drivermotor3_9: BL1_drivermotor3.9 R10_drivermotor3.2 | length 10.7
  Top Layer w0.6: R10_drivermotor3.2@40.786,-26.455 cw(c40.786,-27.176) 41.296,-26.666 ; R10_drivermotor3.2@40.869,-26.238 41.783,-27.153 41.783,-31.878 BL1_drivermotor3.9@44.16,-34.255 ; R10_drivermotor3.2@41.136,-26.105 ccw(c42.105,-26.105) 41.42,-26.79
NetBL1_drivermotor3_10: BL1_drivermotor3.10 R9_drivermotor3.2 | length 10.3
  Top Layer w0.6: R9_drivermotor3.2@39.442,-27.89 cw(c39.442,-28.699) 40.014,-28.127 ; R9_drivermotor3.2@39.497,-27.61 40.234,-28.346 40.234,-31.742 BL1_drivermotor3.10@43.453,-34.962 ; R9_drivermotor3.2@39.792,-27.54 ccw(c40.674,-27.54) 40.05,-28.163
NetBL1_drivermotor4_8: BL1_drivermotor4.8 R11_drivermotor4.2 | length 8.9
  Top Layer w0.6: R11_drivermotor4.2@43.747,16.541 45.385,17.069 45.464,17.095 45.49,17.069 49.454,17.069 49.479,17.094 49.581,17.094 BL1_drivermotor4.8@51.243,18.186 ; R11_drivermotor4.2@44.114,16.298 cw(c45.158,15.763) 44.798,16.88
NetBL1_drivermotor4_9: BL1_drivermotor4.9 R10_drivermotor4.2 | length 8.8
  Top Layer w0.6: R10_drivermotor4.2@44.834,14.878 R10_drivermotor4.2@45.133,15.008 ; R10_drivermotor4.2@44.907,14.783 R10_drivermotor4.2@45.133,15.008 ; R10_drivermotor4.2@45.215,14.667 cw(c46.315,14.236) 45.842,15.318 ; 49.581,15.875 47.117,15.875 R10_drivermotor4.2@45.133,15.008 ; 49.682,15.926 BL1_drivermotor4.9@51.798,17.354
NetBL1_drivermotor4_10: BL1_drivermotor4.10 R9_drivermotor4.2 | length 10.2
  Top Layer w0.6: R9_drivermotor4.2@45.931,13.112 46.611,13.541 ; R9_drivermotor4.2@46.02,13.45 ccw(c46.212,14.174) 46.611,13.541 ; R9_drivermotor4.2@46.275,13.046 cw(c47.011,12.907) 46.611,13.541 ; R9_drivermotor4.2@46.328,12.951 cw(c47.485,12.689) 46.852,13.692 ; R9_drivermotor4.2@46.336,13.016 cw(c47.013,12.993) 46.652,13.566 ; BL1_drivermotor4.10@52.352,16.522 50.165,15.009 48.743,14.884 46.611,13.541
NetC7_2: C7.2 R12.2 R35.1 | length 9.5
  Bottom Layer w0.6: C7.2@-30.842,28.959 R35.1@-29.089,27.689 R12.2@-27.413,26.571 ; C7.2@-30.704,28.558 cw(c-30.573,27.737) -30.085,28.41 ; C7.2@-30.413,28.959 ccw(c-29.566,29.094) -30.069,28.399 ; -29.862,28.249 cw(c-30.366,27.554) R35.1@-29.518,27.689 ; -29.847,28.238 ccw(c-29.359,28.911) R35.1@-29.228,28.09 ; R35.1@-28.938,27.29 cw(c-28.772,26.462) -28.303,27.165 cw(c-27.834,27.868) R35.1@-28.663,27.702 ; R12.2@-27.839,26.558 ccw(c-28.668,26.393) -28.199,27.096 ccw(c-27.731,27.799) R12.2@-27.565,26.97
NetC8_2: C8.2 R36.2 R37.1 | length 4.3
  Bottom Layer w0.8: R36.2@26.783,-27.344 R37.1@28.053,-28.614 29.385,-29.947 C8.2@29.439,-29.947 ; 28.79,-29.351 ccw(c29.303,-28.838) C8.2@29.303,-29.564
NetC9_2: C9.2 R38.2 R39.1 | length 2.2
  Bottom Layer w1: C9.2@-28.663,-38.645 -27.127,-40.18 R38.2@-27.127,-40.183
  other v1: -27.254,-40.056
NetC10_2: C10.2 R40.2 R41.1 | length 9.4
  Bottom Layer w0.6: C10.2@-51.269,-11.571 -49.835,-10.137 -49.835,-10.058 -48.26,-8.484 R40.2@-48.133,-8.484 ; C10.2@-51.198,-11.15 ccw(c-51.198,-10.305) -50.6,-10.903 ccw(c-50.003,-11.5) C10.2@-50.848,-11.5 ; -50.532,-10.835 ccw(c-51.173,-10.194) R41.1@-50.267,-10.194 ; -50.471,-10.773 cw(c-49.917,-11.328) R41.1@-49.917,-10.544 ; R41.1@-49.775,-9.703 ccw(c-49.775,-8.987) -49.269,-9.493 ; R41.1@-49.425,-10.053 cw(c-48.451,-10.053) -49.14,-9.364 ; -49.034,-9.258 cw(c-48.215,-10.076) R40.2@-48.215,-8.918
NetC21_1: C21.1 U8.6 | length 3.8
  Bottom Layer w0.6: 24.714,-43.732 ccw(c25.457,-43.732) v2@24.932,-44.258 ; 24.714,-43.556 cw(c25.326,-43.556) U8.6@24.893,-43.124 ; v2(24.79,-44.399) 24.816,-44.425 24.816,-44.545 24.714,-44.647 24.714,-43.303 U8.6@25.459,-42.558
NetC28_1: C28.1 U10.6 | length 5
  Bottom Layer w0.6: U10.6@-27.505,-43.99 -26.079,-45.415 ; U10.6@-26.994,-44.501 ccw(c-25.349,-42.856) v1@-25.349,-45.182 ; v1@-25.644,-45.675 ccw(c-26.079,-45.909) -26.079,-45.415 ; v1@-25.451,-45.415 -26.079,-45.415
  other v1: -25.349,-45.517
NetC30_2: C30.2 MPU6050.20 | length 4.1
  Bottom Layer w0.254: C30.2@7.317,27.746 7.402,27.746 8.218,28.562 ; C30.2@7.385,28.106 ccw(c7.52,28.63) C30.2@7.903,28.247 ; C30.2@7.448,28.352 ccw(c7.65,29.13) 8.218,28.562 ; C30.2@7.84,27.846 cw(c8.658,27.846) 8.08,28.424 ; MPU6050.20@9.057,28.562 8.218,28.562
NetC31_2: C31.2 MPU6050.10 | length 2.4
  Bottom Layer w0.254: MPU6050.10@13.107,29.062 13.568,29.062 14.88,27.749 C31.2@15.009,27.749
NetC59_2: C59.2 R42.2 R43.1 | length 4.1
  Bottom Layer w1: R42.2@47.466,-4.651 49.11,-3.588 50.874,-2.447 C59.2@50.927,-2.413
NetC60_2: C60.2 R44.1 R45.2 | length 7.7
  Bottom Layer w0.508: R45.2@27.574,-39.131 cw(c27.216,-40.673) R44.1@28.586,-39.882 ; R45.2@27.661,-39.141 cw(c27.661,-40.177) 28.393,-39.445 ; R45.2@27.697,-38.749 29.03,-40.081 R44.1@29.083,-40.081 ; R45.2@27.768,-39.216 cw(c27.768,-40.172) 28.444,-39.496 cw(c29.12,-38.82) R45.2@28.164,-38.82 ; R45.2@28.042,-38.76 ccw(c28.845,-38.76) 28.277,-39.329 ; 28.253,-39.305 cw(c27.534,-40.025) R44.1@28.551,-40.025 ; 28.315,-39.366 ccw(c28.947,-38.734) R44.1@28.947,-39.629
  other v1: 27.661,-38.76
NetD3_1: D3.1 R18.1 | length 5.8
  Top Layer w0.635: v1@12.217,-63.817 cw(c12.217,-64.768) 12.889,-64.096 ; v1@12.294,-63.5 13.208,-64.414 D3.1@13.208,-66.411 ; v1@12.535,-63.5 ccw(c13.117,-63.5) 12.706,-63.912 ; D3.1@12.973,-66.176 ccw(c12.405,-65.608) 13.208,-65.608 ccw(c14.011,-65.608) D3.1@13.443,-66.176
  other v1: 12.217,-63.5
NetD5_1: D5.1 R19.1
  other v1: -15.24,-68.986
NetD7_2: D7.2 L1.1 U9.2 | length 22.1
  Top Layer w1: 0.704,-53.257 cw(c-0.674,-54.635) D7.2@1.275,-54.635 ; U9.2@0.706,-49.398 cw(c3.681,-49.249) 1.575,-47.143 ; D7.2@2.083,-54.635 0.506,-53.059 U9.2@0.506,-49.708 0.506,-48.211 1.575,-47.142 ; 8.286,-46.07 cw(c9.576,-47.36) L1.1@9.576,-45.536 ; L1.1@8.941,-45.415 7.214,-47.142 1.575,-47.142
NetD8_1: D8.1 R21.1 | length 3.5
  Top Layer w0.75: R21.1@-9.566,-67.767 -7.798,-67.767 D8.1@-7.722,-67.691 ; R21.1@-9.371,-67.962 cw(c-8.902,-68.431) -8.902,-67.767 cw(c-8.902,-67.103) R21.1@-9.371,-67.573 ; -8.521,-67.767 ccw(c-8.521,-66.982) D8.1@-7.965,-67.537
NetD9_1: D9.1 R31.1
  other v1: -23.647,43.739
NetD9_2: D9.2 Q4.1
  other v1: -26.06,43.815
NetF2_2: F2.2 S3.1 S4.2 S4.3 | length 41.3
  Bottom Layer w2: S4.2@-12.987,-48.775 S4.3@-10.159,-51.604 -8.422,-53.34 ; F2.2@-9.21,-58.212 ccw(c-11.113,-56.31) -8.422,-56.31 ; -8.422,-54.14 ccw(c-2.663,-54.14) F2.2@-6.736,-58.212 ; F2.2@-7.95,-62.027 -8.422,-61.555 -8.422,-53.34 ; S3.1@10.159,-51.604 8.422,-53.34 -8.422,-53.34
NetIR_2: IR.2 R13.2 VR1.1 | length 15.8
  Top Layer w0.6: IR.2@7.798,43.51 7.798,43.282 11.354,39.726 VR1.1@11.354,39.218 ; IR.2@8.248,43.51 ccw(c9.886,43.51) 8.728,42.352 ; 10.09,40.989 cw(c8.369,39.268) VR1.1@10.803,39.268 ; R13.2@10.094,35.433 11.506,36.845 11.506,38.608 VR1.1@11.303,38.811 ; R13.2@10.094,35.883 ccw(c10.094,36.969) 10.862,36.201 ; R13.2@10.444,35.533 cw(c11.048,35.533) R13.2@10.621,35.96 ; VR1.1@10.949,38.915 cw(c9.605,37.571) 11.506,37.571
NetIR_3: IR.3 R15.2 | length 3.9
  Top Layer w0.8: R15.2@2.728,43.51 IR.3@5.258,43.51 IR.3@5.283,43.51 ; IR.3@5.01,43.263 ccw(c4.413,42.665) 4.413,43.51 ccw(c4.413,44.355) IR.3@5.01,43.758
NetJumper_BUZ_1: Jumper_BUZ.1 Q1.1 | length 10.6
  Bottom Layer w0.6: Jumper_BUZ.1@-40.259,39.599 -40.056,39.802 -37.744,39.802 Q1.1@-33.294,35.352 ; Jumper_BUZ.1@-39.915,39.509 cw(c-39.209,38.802) -39.209,39.802 ; Jumper_BUZ.1@-39.915,40.145 ccw(c-39.086,40.975) -39.086,39.802
NetJumper_BUZ_2: Jumper_BUZ.2 LS1.1 | length 13.6
  Bottom Layer w0.635: Jumper_BUZ.2@-41.948,37.408 cw(c-42.817,36.539) -41.588,36.539 ; -41.588,36.8 cw(c-40.729,36.8) Jumper_BUZ.2@-41.337,37.408 ; Jumper_BUZ.2@-41.588,37.914 -41.588,34.603 -39.218,32.233 -35.794,32.233 -35.69,32.337 LS1.1@-35.622,32.337 ; -36.918,32.233 ccw(c-36.918,33.634) LS1.1@-35.928,32.643 ; -36.414,32.233 cw(c-36.414,31.545) LS1.1@-35.928,32.031
NetLED_LED1_1: LED_LED1.1 R17_LED1.1
  other v1: -18.771,43.637
NetLED_LED1_2: LED_LED1.2 Q3_LED1.1
  other v1: -20.879,43.815
NetLED_LED2_1: LED_LED2.1 R17_LED2.1
  other v1: -12.446,43.637
NetLED_LED2_2: LED_LED2.2 Q3_LED2.1
  other v1: -14.326,43.84
NetLED_LED3_1: LED_LED3.1 R17_LED3.1
  other v1: -5.817,43.688
NetLED_LED3_2: LED_LED3.2 Q3_LED3.1
  other v1: -7.645,43.891
NetLED_LED4_1: LED_LED4.1 R17_LED4.1
  other v1: 34.976,43.409
NetLED_LED4_2: LED_LED4.2 Q3_LED4.1
  other v1: 33.122,43.891
NetLED_LED5_1: LED_LED5.1 R17_LED5.1
  other v1: 29.159,43.536
NetLED_LED5_2: LED_LED5.2 Q3_LED5.1
  other v1: 27.203,43.815
NetLED_LED6_1: LED_LED6.1 R17_LED6.1
  other v1: 23.317,43.663
NetLED_LED6_2: LED_LED6.2 Q3_LED6.1
  other v1: 21.412,43.815
NetLED_LED7_1: LED_LED7.1 R17_LED7.1
  other v1: 17.602,43.637
NetLED_LED7_2: LED_LED7.2 Q3_LED7.1
  other v1: 15.646,43.866
NetLS1_2: LS1.2 R2.2 | length 7.6
  Bottom Layer w0.635: LS1.2@-30.234,37.293 cw(c-30.234,34.535) -28.283,36.485 ; LS1.2@-30.234,37.928 cw(c-30.234,36.703) -29.367,37.569 ; LS1.2@-29.524,37.725 R2.2@-27.243,35.444 ; R2.2@-27.646,35.515 ccw(c-28.449,35.515) -27.881,36.083 ccw(c-27.314,36.65) R2.2@-27.314,35.848
NetMPU6050_9: MPU6050.9 R26.1 R27.2 | length 11.8
  Bottom Layer w0.254: MPU6050.9@13.107,29.562 14.982,29.562 R27.2@14.984,29.56 ; 13.694,29.562 cw(c13.694,28.237) R27.2@14.631,29.174 ; 13.781,29.562 ccw(c13.781,30.763) R27.2@14.631,29.913 ; 14.307,29.562 cw(c14.307,28.851) R27.2@14.81,29.353
  Bottom Layer w0.381: R26.1@14.659,30.919 cw(c13.875,30.134) 14.984,30.134 cw(c16.093,30.134) R26.1@15.309,30.919 ; R27.2@14.675,29.968 ccw(c13.931,30.713) R26.1@14.984,30.713 ; R27.2@14.718,30.006 ccw(c14.427,30.38) 14.885,30.503 ; R27.2@14.771,30.041 ccw(c14.46,30.579) 15.06,30.419 ; 14.89,30.485 ccw(c15.595,30.674) R27.2@15.23,30.041 ; R26.1@14.984,30.793 ccw(c16.15,30.793) R27.2@15.325,29.968 ; R26.1@14.984,31.344 14.984,29.56 R27.2@15,29.544 ; 15.068,30.45 ccw(c15.424,30.354) R27.2@15.236,30.038
NetProgrammer_1: Programmer.1 U2.56 | length 44.4
  Top Layer w0.254: U2.56@-2.079,7.495 cw(c-2.332,7.242) -1.975,7.242 cw(c-1.617,7.242) U2.56@-1.87,7.495 ; U2.56@-1.975,8.2 -1.975,6.147 -0.959,5.131 v2(-0.533,5.131)
  Top Layer w0.508: -29.794,8.76 cw(c-27.805,8.76) Programmer.1@-29.212,10.166 ; Programmer.1@-29.794,10.439 -29.794,8.712 -23.317,2.235 -18.161,2.235 v1@-15.443,4.953 ; v1@-15.799,4.978 cw(c-16.719,4.978) -16.068,4.328 cw(c-15.418,3.678) v1@-15.418,4.597
  Bottom Layer w0.508: v1@-15.418,4.953 -15.24,5.131 v2(-0.533,5.131) ; v1@-15.148,4.709 cw(c-14.13,3.691) -14.13,5.131 ; v2@-0.707,4.957 ccw(c-1.127,4.537) -1.127,5.131 ccw(c-1.127,5.725) v2@-0.707,5.305
  other v1: -15.418,4.978